# Altium PCB PCB1.PcbDoc
Units mil, origin at the board's own origin, x right, y up, seen from the top; angles counter-clockwise.
Board outline 1950 x 1950 mil, 2 copper layers (Top Layer, Bottom Layer); 9 components, 10 nets, 54 pads, 6 vias.
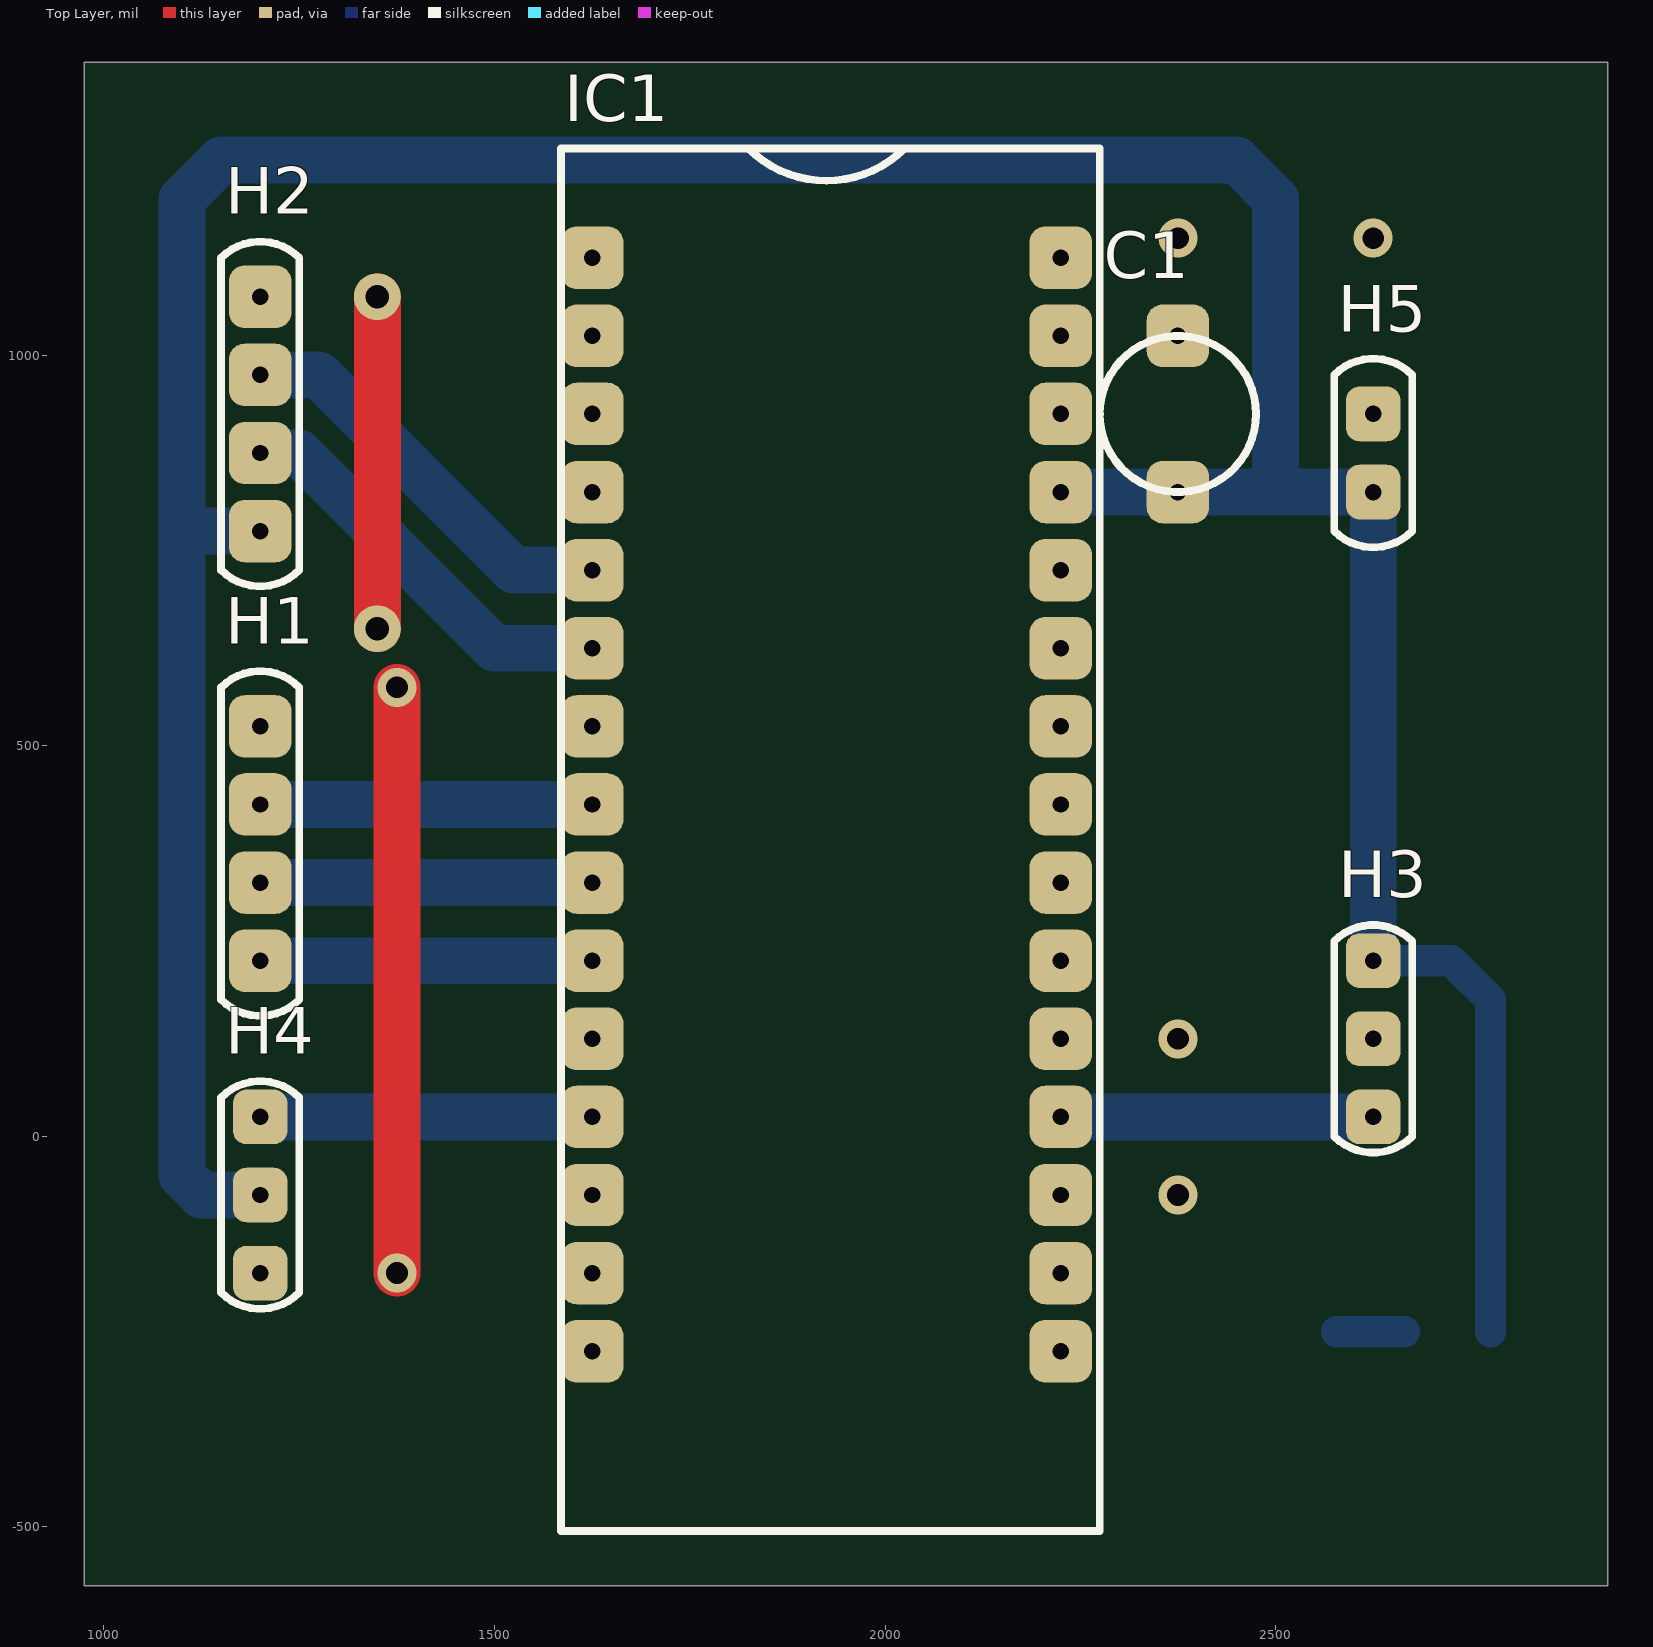
[diagram p0: Top Layer view]
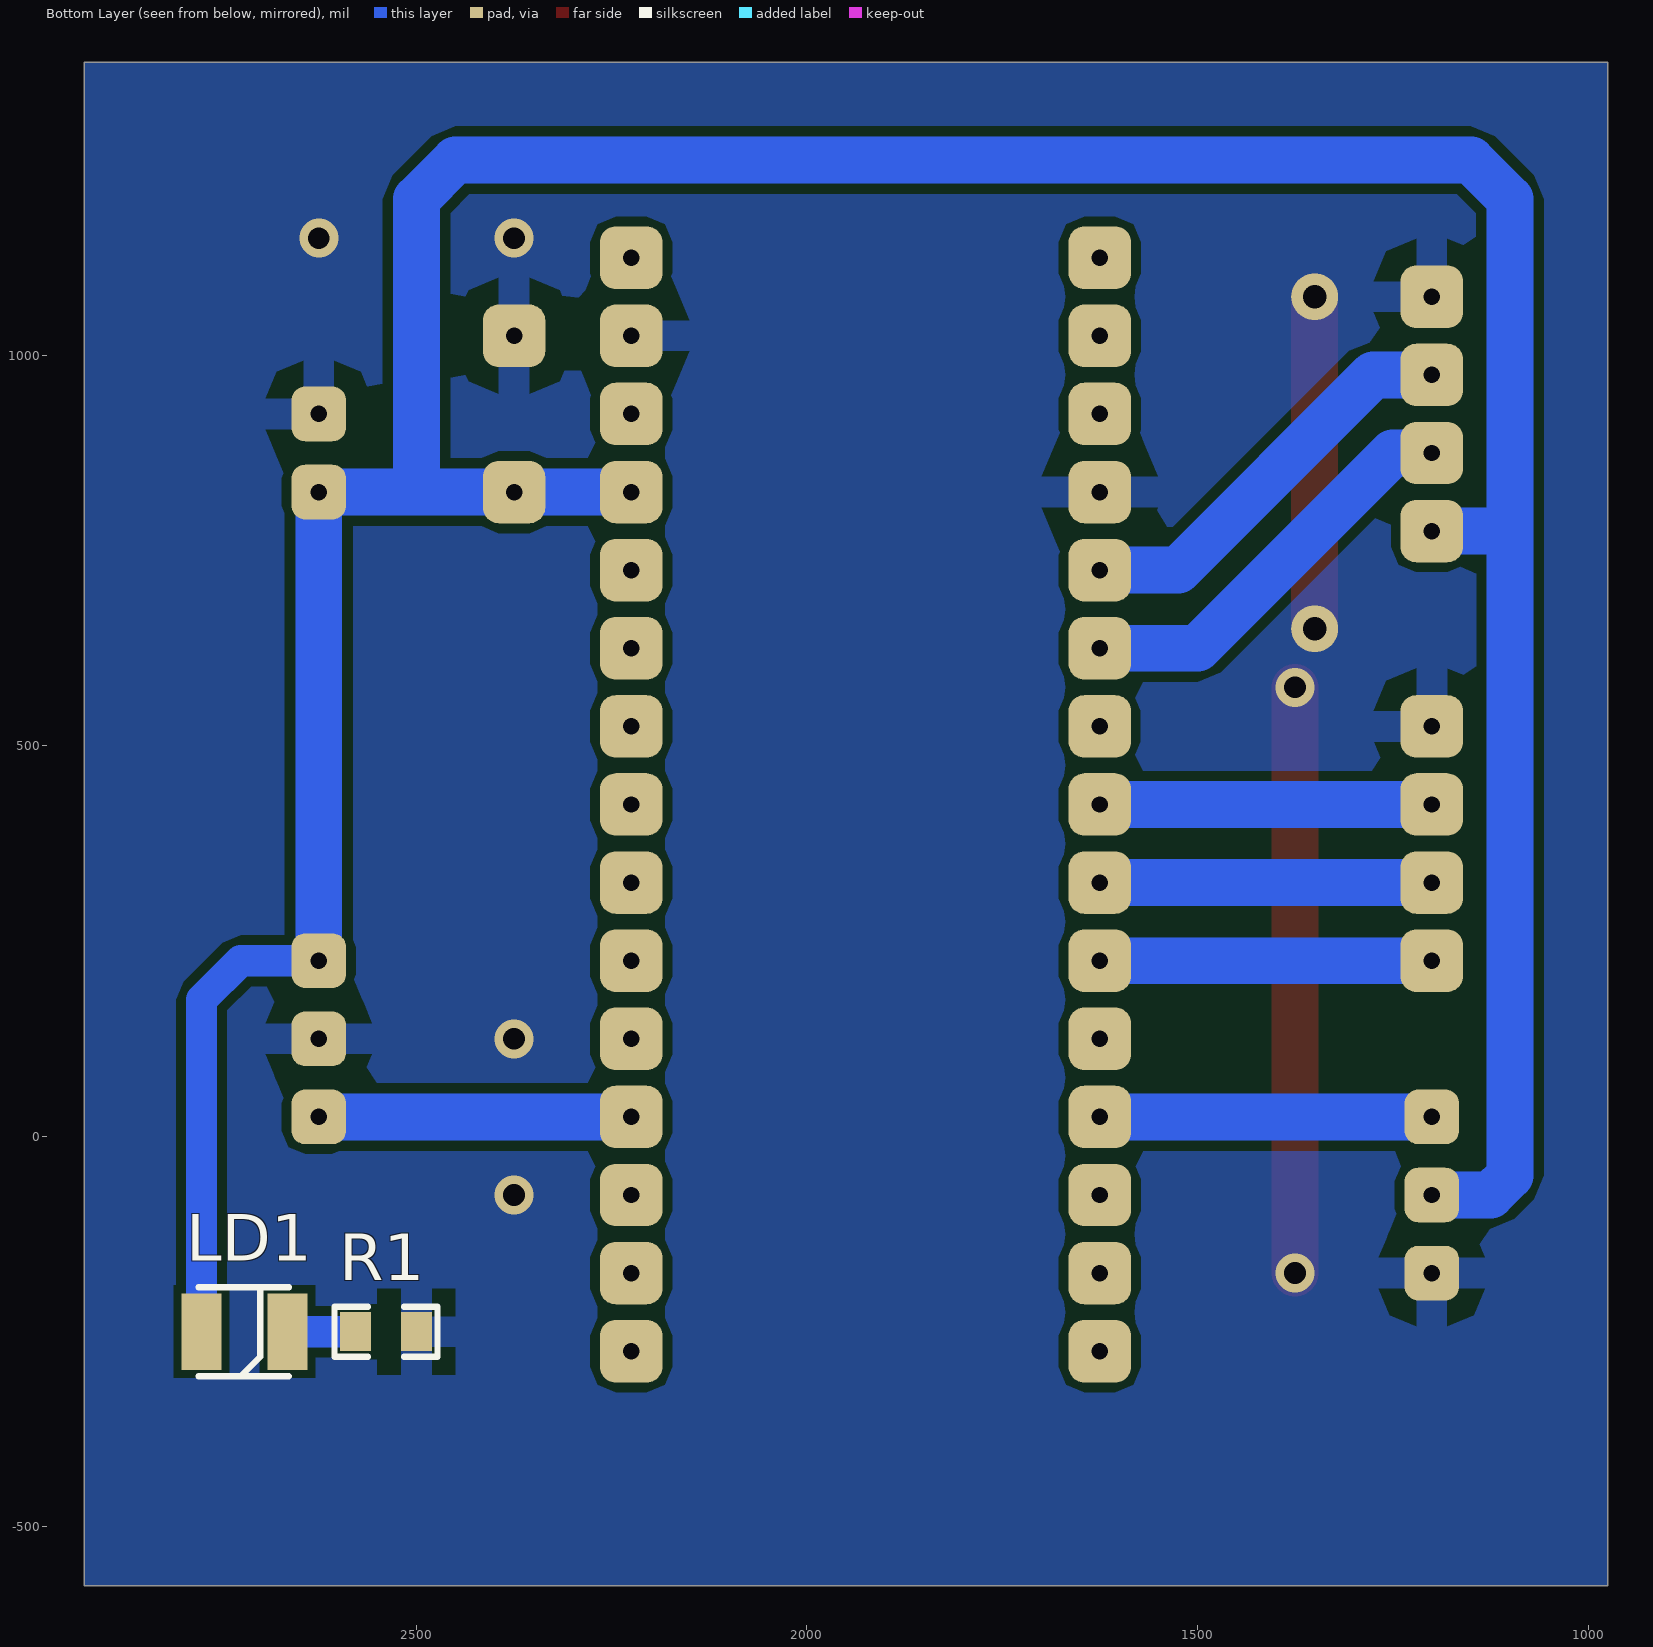
[diagram p1: Bottom Layer view, seen from below]

## Layer stack, top to bottom
Top Solder: solder mask 0.4, Solder Resist, Dk 3.5
Top Layer: signal copper 1.4
Dielectric 1: dielectric 12.6, FR-4, Dk 4.8
Bottom Layer: signal copper 1.4
Bottom Solder: solder mask 0.4, Solder Resist, Dk 3.5

## Board outline
975,-575 975,1375 2925,1375 2925,-575

## Design rules (kind name [scope] priority, off if disabled: settings)
Clearance [All] p1: gap=10
PlaneClearance PlaneClearance_1 [InNet('GND')] p1: clearance=40
PlaneClearance [InNet('GND')] p2: clearance=30
PlaneConnect [All] p1: planeconnectstyle=Relief reliefexpansion=20 reliefentries=4 reliefconductorwidth=40 reliefairgap=40
PolygonConnect [All] p1: connectstyle=Relief reliefconductorwidth=40 reliefentries=4 polygonreliefangle="90 Angle" airgapwidth=30
RoutingVias [All] p1: holewidth=28 width=50 viastyle="Through Hole" minholewidth=28 minwidth=50 maxholewidth=28 maxwidth=50
SolderMaskExpansion [All] p1: expansion=4
UnpouredPolygon [All] p1: allowunpoured=FALSE
Width [All] p1: maxlimit=60 minlimit=20 preferedwidth=40 minimp=50.000000 maximp=50.000000 favimp=50.000000
27 further rules are at their usual default settings.

## Components (designator, comment, footprint, x,y, rotation, side; value= is the part's Value field where it differs from the comment)
C1 "C1" C1(ceramic) 2375,1025 r270 top
H1 "Header1x4" Header1x4 1200,525 r270 top
H2 "UltraZvucni" Header1x4 1200,1075 r270 top
H3 "IR Senzor" "Header 1x3" 2625,25 r90 top
H4 "Servo" "Header 1x3" 1200,-175 r90 top
H5 "Header1x2" Header1x2 2625,825 r90 top
IC1 "ArduinoNano" "Arduino Nano" 2225,-275 r90 top
LD1 "LED" "LED SMD 3528" 2775,-250 r180 bottom
R1 "R1" "R 0805" 2500,-250 r0 bottom

## Footprints (in the part's own frame and the unit in brackets; to place one, negate y for a bottom-side part, rotate by r counter-clockwise, add the part's x,y. Pads: shape width x height; smd on the part's side, far side on the other; paste and mask are expansions set on the pad)
"Arduino Nano" [mil]
  rrect50% 80x80 hole 21: 1(0,0) 2(100,0) 3(200,0) 4(300,0) 5(400,0) 6(500,0) 7(600,0) 8(700,0) 9(800,0) 10(900,0) 11(1000,0) 12(1100,0) 13(1200,0) 14(1300,0) 15(1400,0) 16(1400,600) 17(1300,600) 18(1200,600) 19(1100,600) 20(1000,600) 21(900,600) 22(800,600) 23(700,600) 24(600,600) 25(500,600) 26(400,600) 27(300,600) 28(200,600) 29(100,600) 30(0,600)
  silkscreen extent -230,-50 1540,640, body extent -231,-50 1541,643, height 474
C1(ceramic) [mil]
  rrect50% 80x80 hole 21: 1(0,0) 2(200,0)
  silkscreen extent 0,-100 200,100, body extent -37,-33 238,33, height 258
Header1x2 [mil]
  rrect50% 70x70 hole 21: 1(0,0) 2(100,0)
  silkscreen extent -71,-50 171,50
Header1x4 [mil]
  rrect50% 80x80 hole 21: 1(0,0) 2(100,0) 3(200,0) 4(300,0)
  silkscreen extent -71,-50 371,50
"Header 1x3" [mil]
  rrect50% 70x70 hole 21: 1(0,0) 2(100,0) 3(200,0)
  silkscreen extent -46,-50 246,50
"LED SMD 3528" [mm]
  rect 1.3x2.5 smd: 1(0,0) 2(2.794,0)
  silkscreen extent -0.1,-1.45 2.84,1.45, body extent -0.65,-1.4 3.43,1.4, height 1.86
"R 0805" [mil]
  rect 40x50 smd: 1(0,0) 2(78,0)
  silkscreen extent -27,-32 105,32, body extent -20,-25 98,25, height 18

## Part data
H2: library part Header1x4
H3 H4: library part "Header 1x3"

## Free pads (board coordinates)
  round 60 hole 30: 0(1350,650) 1(1350,1075)

## Via types
v1: diameter 50, hole 28, Top Layer to Bottom Layer, 6 vias

## Nets (pads, with @x,y where several pads share a name; then routed paths per layer and width w, separated by ;. In a path a pad name is that pad's centre, name@x,y a point inside that pad or via, vN(x,y) a via of type N, cw(c..) or ccw(c..) an arc to the next point about the centre after c; other vN are vias at no path point)
GND: C1.1 H1.1 H2.1 H3.2 H4.1 H5.2 IC1.14 IC1.19 pad.0 pad.1 R1.1 | length 1175
  Top Layer w60: pad.0 pad.1 ; v1(1375,-175) v1(1375,575)
  other v1: 2375,-75 2375,125 2375,1150 2625,1150
NetH1_2: H1.2 IC1.23 | length 425
  Bottom Layer w60: H1.2 IC1.23
NetH1_3: H1.3 IC1.24 | length 425
  Bottom Layer w60: H1.3 IC1.24
NetH1_4: H1.4 IC1.25 | length 425
  Bottom Layer w60: H1.4 IC1.25
NetH2_2: H2.2 IC1.20 | length 528.6
  Bottom Layer w60: H2.2 1275,975 1525,725 IC1.20
NetH2_3: H2.3 IC1.21 | length 528.6
  Bottom Layer w60: H2.3 1250,875 1500,625 IC1.21
NetH3_1: H3.1 IC1.4 | length 400
  Bottom Layer w60: IC1.4 H3.1
NetH4_3: H4.3 IC1.27 | length 425
  Bottom Layer w60: H4.3 IC1.27
NetLD1_2: LD1.2 R1.2 | length 87
  Bottom Layer w40: R1.2 LD1.2
VCC: C1.2 H2.4 H3.3 H4.2 H5.1 IC1.12 LD1.1 | length 4872.5
  Bottom Layer w40: H3.3 2725,225 2775,175 LD1.1
  Bottom Layer w60: H4.2 1125,-75 1100,-50 1100,775 ; H2.4 1100,775 ; IC1.12 C1.2 2500,825 ; H3.3 H5.1 2500,825 ; 1100,775 1100,1200 1150,1250 2450,1250 2500,1200 2500,825
pads on no net: IC1.1 IC1.2 IC1.3 IC1.5 IC1.6 IC1.7 IC1.8 IC1.9 IC1.10 IC1.11 IC1.13 IC1.15 IC1.16 IC1.17 IC1.18 IC1.22 IC1.26 IC1.28 IC1.29 IC1.30

## Polygon pours and split planes (outlines as drawn)
GND on Bottom Layer "Bottom Layer-gnd" (solid, remove dead copper, pour order 2): 975,-575 2925,-575 2925,1375 975,1375

## Silkscreen, mask and mechanical layers (free items; w line width, h text height)
Mechanical 1:
  the board outline again, w10